# Altium PCB PCB1.PcbDoc
Units mil, origin at the board's own origin, x right, y up, seen from the top; angles counter-clockwise.
Board outline 4235 x 4000 mil, 2 copper layers (Top Layer, Bottom Layer); 49 components, 36 nets, 160 pads, 5 vias.
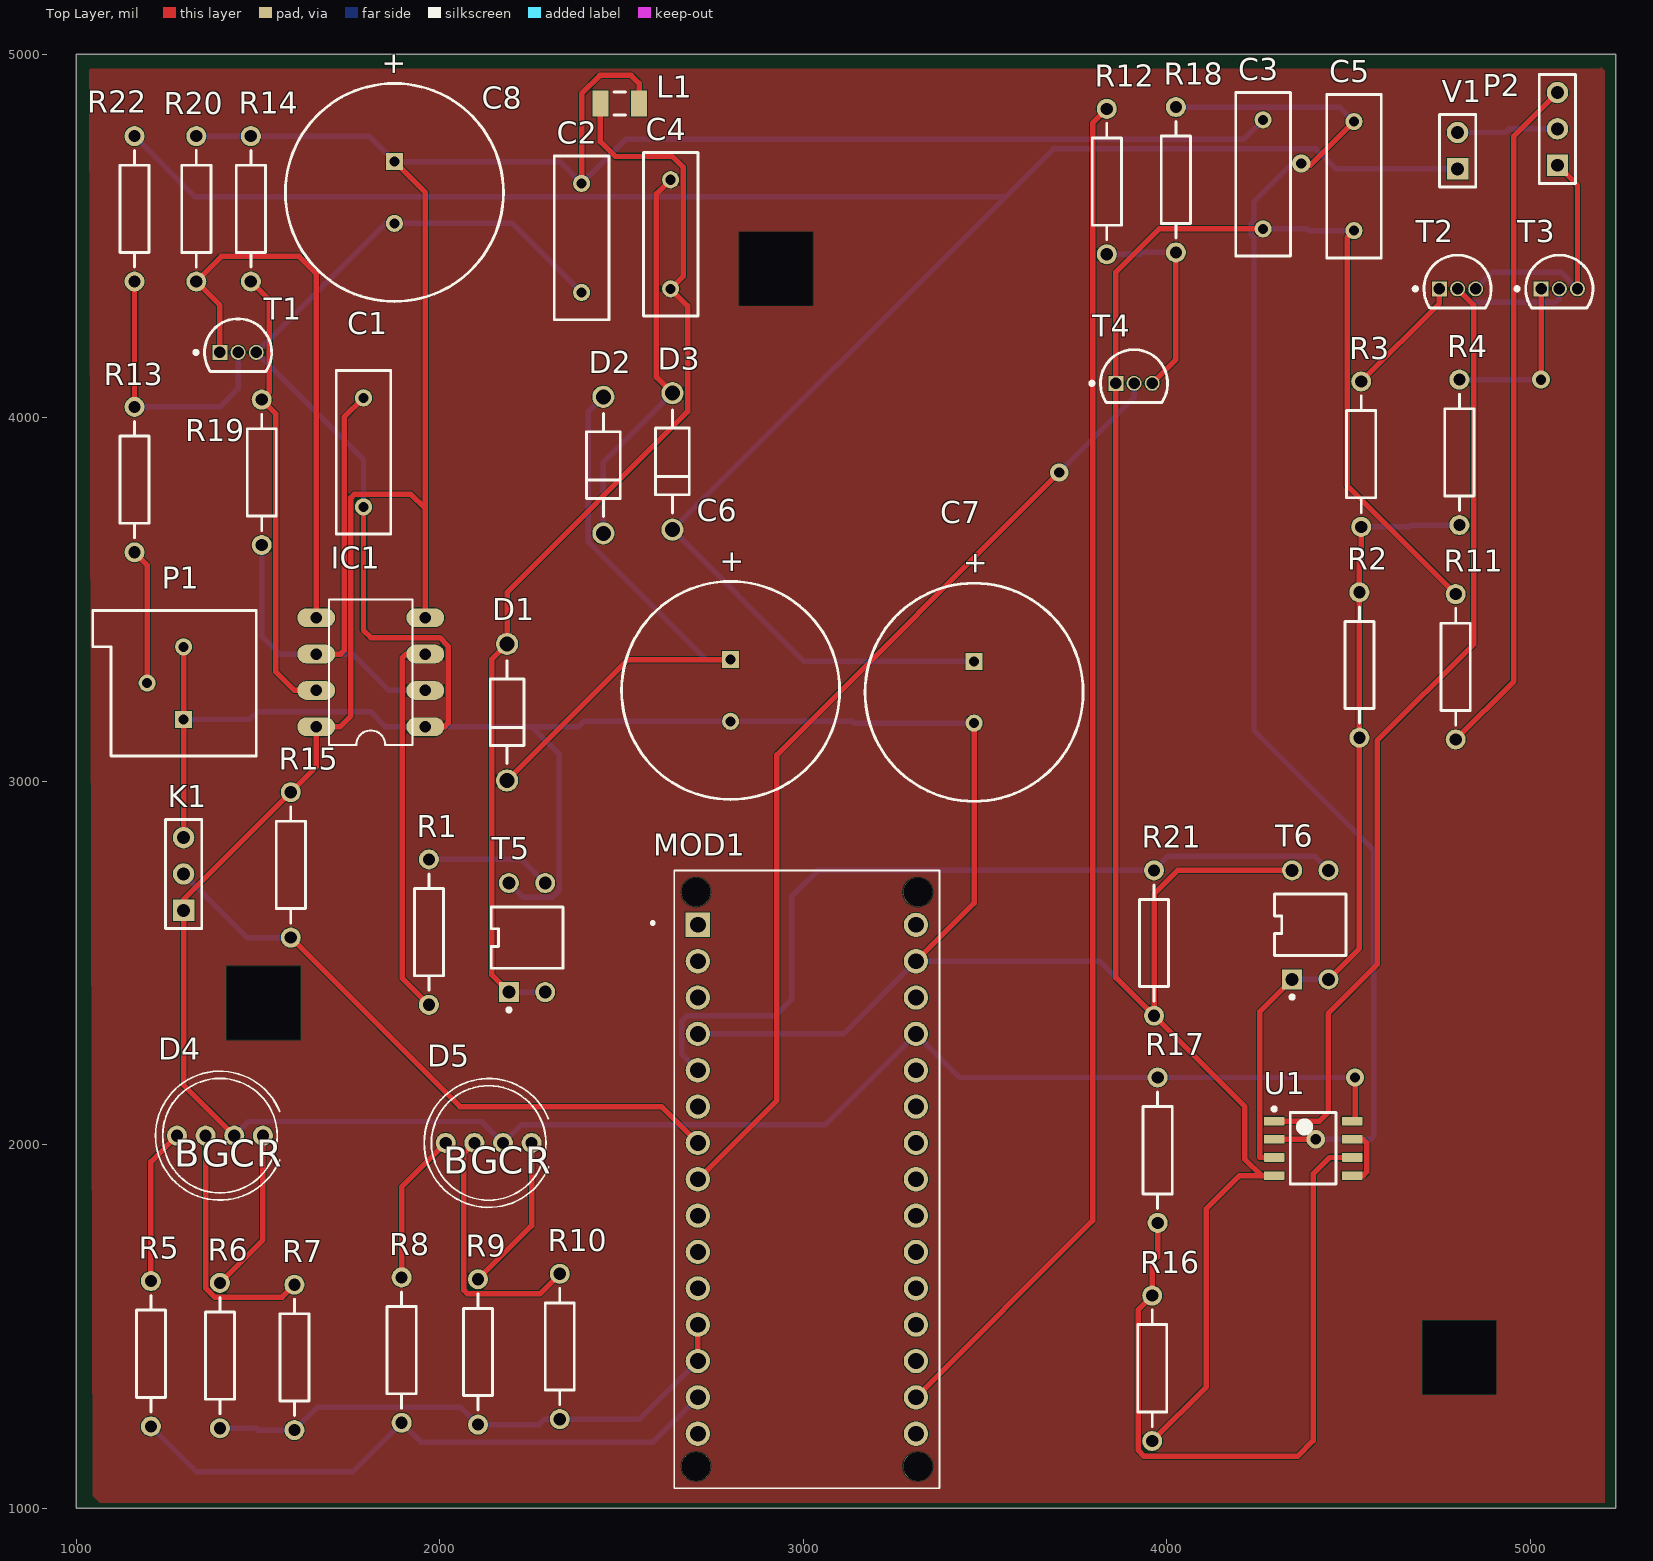
[diagram p0: Top Layer view]
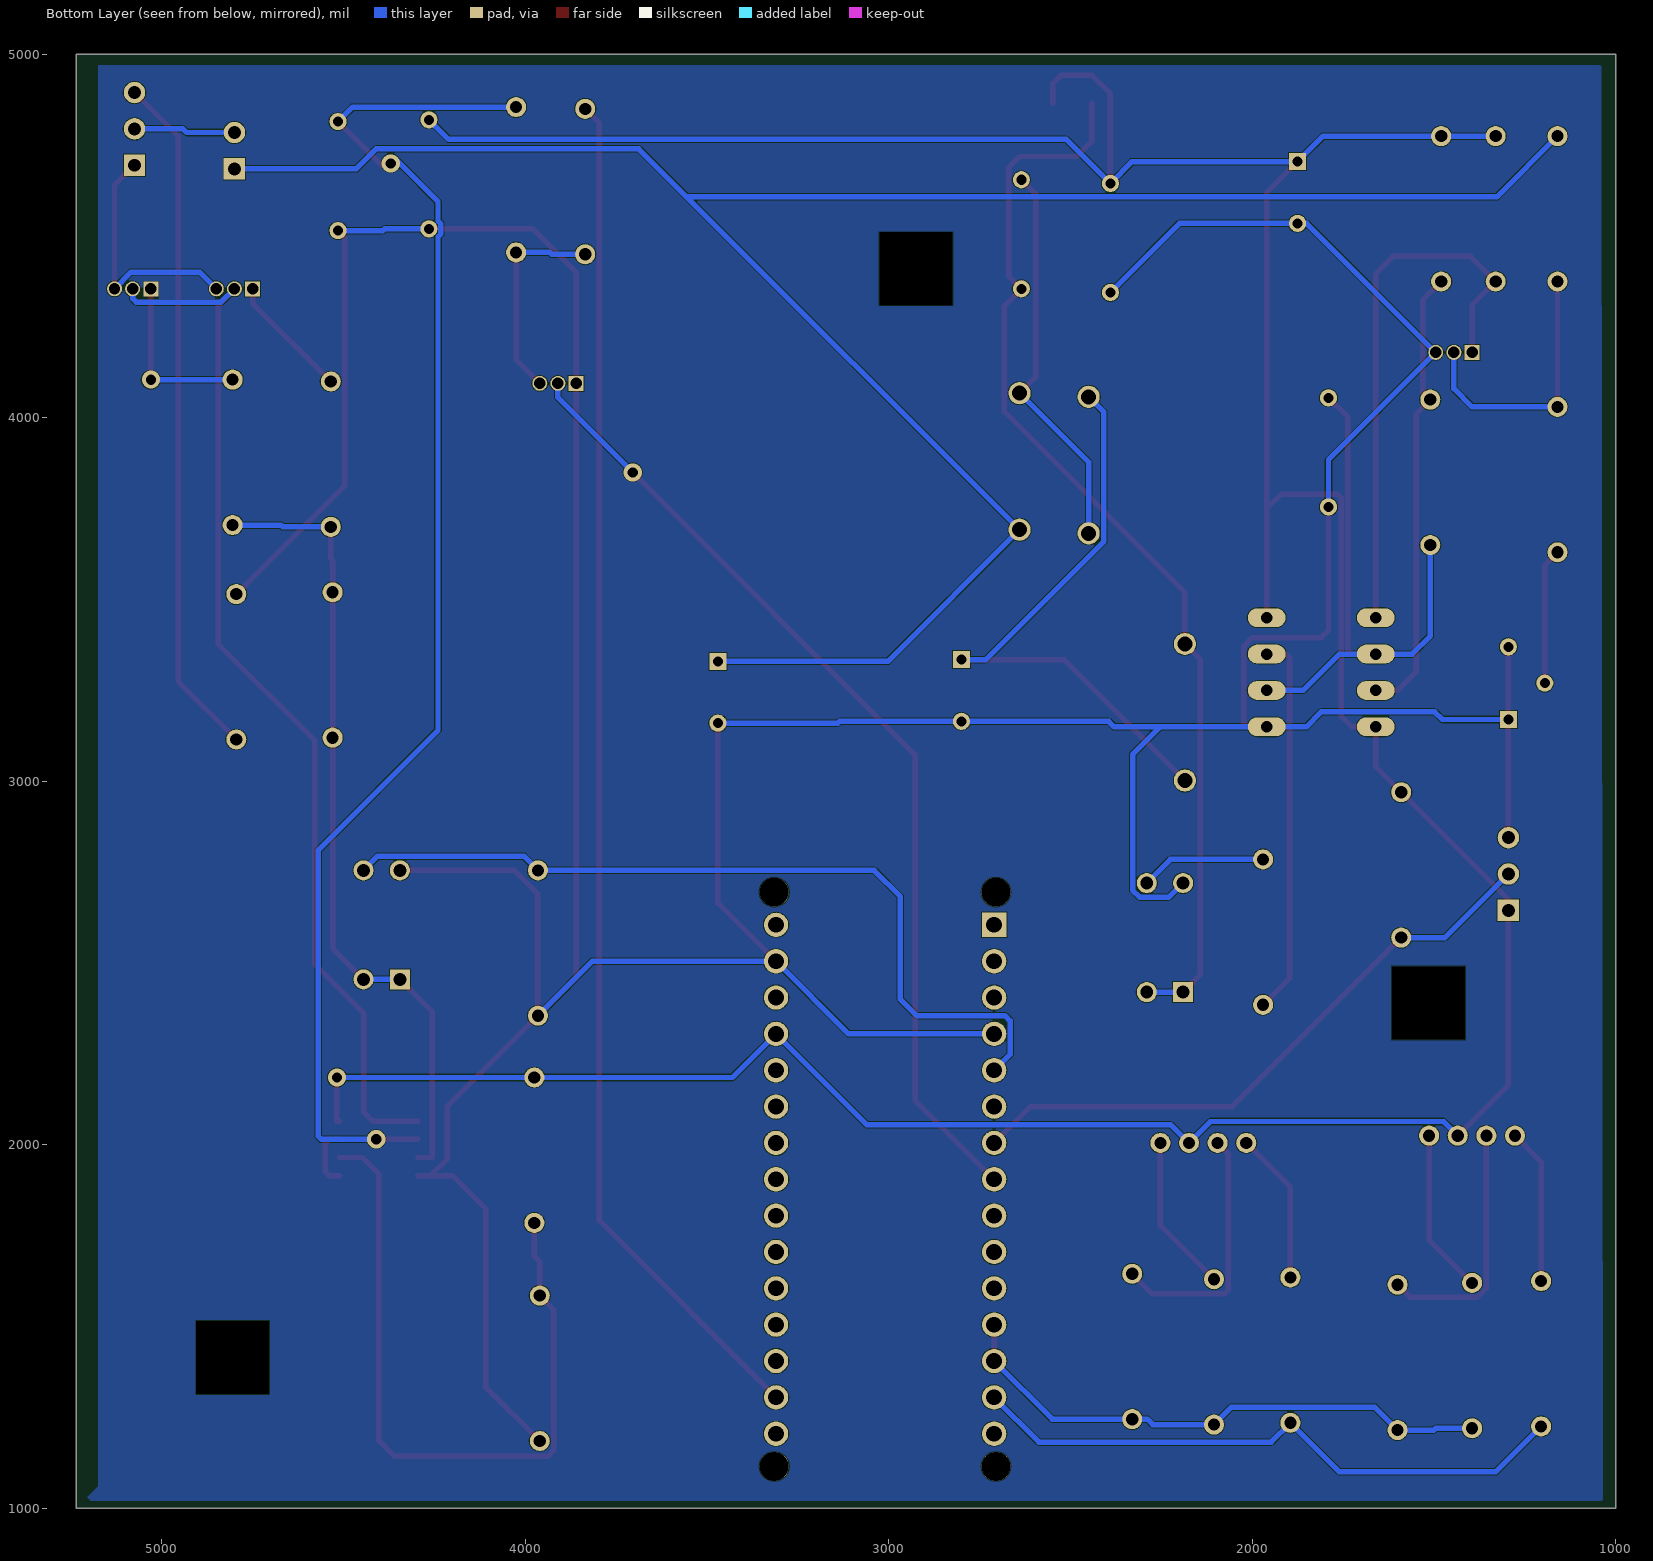
[diagram p1: Bottom Layer view, seen from below]

## Layer stack, top to bottom
Top Solder: solder mask 0.4, Solder Resist, Dk 3.5
Top Layer: signal copper 1.4
Dielectric 1: dielectric 12.6, FR-4, Dk 4.8
Bottom Layer: signal copper 1.4
Bottom Solder: solder mask 0.4, Solder Resist, Dk 3.5

## Board outline
1000,1000 5235,1000 5235,5000 1000,5000
cut-out: 6075,3825
cut-out: 5395,5455
cut-out: 6595,3025

## Design rules (kind name [scope] priority, off if disabled: settings)
Clearance [All] p1: gap=2 ignorepadtopadclearanceinfootprint=FALSE
DiffPairsRouting [All] p1: maxlimit=15 minlimit=15 mostfreqgap=15 toplayer_minwidth=15 toplayer_maxwidth=15 toplayer_prefwidth=15 bottomlayer_minwidth=15 bottomlayer_maxwidth=15 bottomlayer_prefwidth=15 maxuncoupledlength=500
HoleSize [All] p1: absolutevalues=TRUE maxlimit=200 minlimit=1 maxpercent=80.000 minpercent=20.000
MinimumSolderMaskSliver [All] p1: minsoldermaskwidth=0
PolygonConnect [All] p1: connectstyle=Relief reliefconductorwidth=10 reliefentries=4 polygonreliefangle="90 Angle" airgapwidth=10
RoutingVias [All] p1: holewidth=28 width=50 viastyle="Through Hole" minholewidth=28 minwidth=50 maxholewidth=28 maxwidth=50
SilkToSilkClearance [All] p1: silktosilkclearance=0
SilkToSolderMaskClearance [IsPad] p1: minsilkscreentomaskgap=0 clearancetoexposedcopper=TRUE
SolderMaskExpansion [All] p1: expansion=4 istentingtop=FALSE
Width [All] p1: maxlimit=15 minlimit=15 preferedwidth=15 minimp=50.000000 maximp=50.000000 favimp=50.000000
25 further rules are at their usual default settings.

## Components (designator, comment, footprint, x,y, rotation, side; value= is the part's Value field where it differs from the comment)
C1 "Cap" RAD-0.3 1790,3905 r90 top value=330p
C2 "Cap" RAD-0.3 2390,4495 r90 top value=100n
C3 "Cap" RAD-0.3 4265,4670 r90 top value=100n
C4 "Cap" RAD-0.3 2635,4505 r90 top value=100n
C5 "Cap" RAD-0.3 4515,4665 r90 top value=1u
C6 "200V" RB7.6-15 2800,3250 r90 top value=2u2
C7 "200V" RB7.6-15 3470,3245 r90 top value=2u2
C8 "Cap Pol1" RB7.6-15 1875,4620 r90 top value=220u
D1 "MUR160G" ONSC-AXIAL_LEAD-2-59-10_P 2185,3190 r90 top
D2 "MUR160G" ONSC-AXIAL_LEAD-2-59-10_P 2450,3870 r90 top
D3 "MUR160G" ONSC-AXIAL_LEAD-2-59-10_P 2640,3880 r90 top
D4 "DIP-LED-RGB-COMMON-ANODE(4P-D8MM)" *LED4-2.0-D8.0MM 1395,2025 r0 top
D5 "DIP-LED-RGB-COMMON-ANODE(4P-D8MM)" *LED4-2.0-D8.0MM 2134.37,2005 r0 top
IC1 "ICM7555" *DIL08 1810,3300 r90 top
K1 "Header 3" HDR1X3 1295,2645 r90 top
L1 "Inductor" INDC3216 2495,4865 r0 top value=47uH
MOD1 "ARDUINO_NANO" ARDUINO_A000005 3010,1905 r0 top
P1 "RPot" VR4 1245,3270 r90 top value=4.7K
P2 "Header 3" HDR1X3 5075,4695 r90 top
R1 "Res2" AXIAL-0.4 1970,2585 r90 top value=47
R2 "1%" AXIAL-0.4 4530,3320 r90 top value=150
R3 "Res2" AXIAL-0.4 4535,3900 r90 top value=220
R4 "Res2" AXIAL-0.4 4805,3905 r90 top value=220
R5 "Res2" AXIAL-0.4 1205,1425 r90 top value=330
R6 "Res2" AXIAL-0.4 1395,1420 r90 top value=330
R7 "Res2" AXIAL-0.4 1600,1415 r90 top value=330
R8 "Res2" AXIAL-0.4 1895,1435 r90 top value=330
R9 "Res2" AXIAL-0.4 2105,1430 r90 top value=330
R10 "Res2" AXIAL-0.4 2330,1445 r90 top value=330
R11 "1W" AXIAL-0.4 4795,3315 r90 top value=820
R12 "1%" AXIAL-0.4 3835,4650 r90 top value=1k
R13 "1%" AXIAL-0.4 1160,3830 r90 top value=2k2
R14 "Res2" AXIAL-0.4 1480,4575 r90 top value=3k3
R15 "Res2" AXIAL-0.4 1590,2770 r90 top value=4k7
R16 "Res2" AXIAL-0.4 3960,1385 r90 top value=10k
R17 "Res2" AXIAL-0.4 3975,1985 r90 top value=10k
R18 "1%" AXIAL-0.4 4025,4655 r90 top value=10k
R19 "Res2" AXIAL-0.4 1510,3850 r90 top value=27k
R20 "Res2" AXIAL-0.4 1330,4575 r90 top value=27k
R21 "Res2" AXIAL-0.4 3965,2555 r90 top value=100k
R22 "1%" AXIAL-0.4 1160,4575 r90 top value=820k
T1 "BC547B" ONSC-TO-92-3-29-11 1445,4180 r0 top
T2 "MPSA42" ONSC-TO-92-3-29-11 4800,4355 r0 top
T3 "MPSA42" ONSC-TO-92-3-29-11 5080,4355 r0 top
T4 "2N7000" ONSC-TO-92-3-29-11 3910,4095 r0 top
T5 "IRFD110PBF" Vishay_X10-0386_MFG 2240,2570 r90 top
T6 "IRFD110PBF" Vishay_X10-0386_MFG 4395,2605 r90 top
U1 "LM6142AIM" D0008A_N 4402.72,1990 r0 top
V1 "IN-9" HDR1X2 4800,4685 r90 top

## Footprints (in the part's own frame and the unit in brackets; to place one, negate y for a bottom-side part, rotate by r counter-clockwise, add the part's x,y. Pads: shape width x height; smd on the part's side, far side on the other; paste and mask are expansions set on the pad)
*DIL08 [mil]
  oval 52x104 hole 32: 1(-150,-150) 2(-50,-150) 3(50,-150) 4(150,-150) 5(150,150) 6(50,150) 7(-50,150) 8(-150,150)
  silkscreen extent -200,-115 200,115
*LED4-2.0-D8.0MM [mm]
  round 1.4 hole 0.85: 1(3,0) 2(1,0) 3(-1,0) 4(-3,0)
  silkscreen extent -4.5,-4.5 4.18,4.5
ARDUINO_A000005 [mm]
  rect 1.7x1.7 hole 1.1: 1(-7.62,17.78)
  round 1.7 hole 1.1: 2(-7.62,15.24) 3(-7.62,12.7) 4(-7.62,10.16) 5(-7.62,7.62) 6(-7.62,5.08) 7(-7.62,2.54) 8(-7.62,0) 9(-7.62,-2.54) 10(-7.62,-5.08) 11(-7.62,-7.62) 12(-7.62,-10.16) 13(-7.62,-12.7) 14(-7.62,-15.24) 15(-7.62,-17.78) 16(7.62,-17.78) 17(7.62,-15.24) 18(7.62,-12.7) 19(7.62,-10.16) 20(7.62,-7.62) 21(7.62,-5.08) 22(7.62,-2.54) 23(7.62,0) 24(7.62,2.54) 25(7.62,5.08) 26(7.62,7.62) 27(7.62,10.16) 28(7.62,12.7) 29(7.62,15.24) 30(7.62,17.78)
  round 2.028 hole 2.028 unplated: ""(-7.747,-20.066) ""(-7.747,20.066) ""(7.747,-20.066) ""(7.747,20.066)
  silkscreen extent -10.88,-21.59 9.27,21.59
AXIAL-0.4 [mm] "Axial Device, Thru-Hole; 2 Leads; 0.4 in Pin Spacing"
  round 1.4 hole 0.85: 1(-5.08,0) 2(5.08,0)
  silkscreen extent -4.06,-1.02 4.06,1.02
D0008A_N [mm] "SOIC, 8-Leads, Body 5x4mm, Pitch 1.27mm, IPC Medium Density"
  rrect17% 1.45x0.6 smd: 1(-2.725,1.905) 2(-2.725,0.635) 3(-2.725,-0.635) 4(-2.725,-1.905) 5(2.725,-1.905) 6(2.725,-0.635) 7(2.725,0.635) 8(2.725,1.905)
  silkscreen extent -2.85,-2.5 1.6,2.88, body extent -3,-2.45 3,2.45, height 1.63
HDR1X2 [mm] "Connector; Header; 2 Position"
  rect 1.5x1.5 hole 0.9: 1(0,0)
  round 1.5 hole 0.9: 2(2.54,0)
  silkscreen extent -1.27,-1.27 3.81,1.27
HDR1X3 [mm] "Connector; Header; 3 Position"
  rect 1.5x1.5 hole 0.9: 1(0,0)
  round 1.5 hole 0.9: 2(2.54,0) 3(5.08,0)
  silkscreen extent -1.27,-1.27 6.35,1.27
INDC3216 [mm] "Chip Inductor, Body 3.2x1.6mm, IPC High Density"
  rect 1.1x1.8 smd: 1(-1.35,0) 2(1.35,0)
  silkscreen extent -0.4,-0.8 0.4,0.8, body extent -1.7,-0.9 1.7,0.9, height 0.55
ONSC-AXIAL_LEAD-2-59-10_P [mm] "AXIAL, 2-Leads, Diameter 2.35mm"
  round 1.55 hole 1.05: 1(-4.77,0) 2(4.77,0)
  silkscreen extent -3.6,-1.18 3.6,1.18
ONSC-TO-92-3-29-11 [mm] "TO, 3-Leads, Body Dia 4.7mm, Pitch 1.27mm"
  rect 1.05x1.05 hole 0.8: 1(-1.27,0)
  round 1.05 hole 0.8: 2(0,0) 3(1.27,0)
  silkscreen extent -3.07,-1.34 2.35,2.35, body extent -2.35,-1.33 2.36,2.36, height 7.87
RAD-0.3 [mm] "Radial Cap, Thru-Hole; 2 Leads; 0.3 in Pin Spacing"
  round 1.2 hole 0.7: 1(-3.81,0) 2(3.81,0)
  silkscreen extent -5.71,-1.91 5.71,1.91
RB7.6-15 [mm] "Polarized Capacitor (Radial); 2 Leads"
  rect 1.2x1.2 hole 0.7: 1(2.159,0)
  round 1.2 hole 0.7: 2(-2.159,0)
  silkscreen extent -7.62,-7.62 7.62,7.62
Vishay_X10-0386_MFG [mm]
  rect 1.4x1.4 hole 0.9 paste-1000 mask+0: 1(-3.81,1.27)
  round 1.4 hole 0.9 paste-1000 mask+0: 2(3.81,1.27) 3(-3.81,-1.27) 4(3.81,-1.27)
  silkscreen extent -5.17,-2.5 2.14,2.5, body extent -4.61,-2.6 4.61,2.6, height 0.25
VR4 [mm] "Thru-Hole; 3 Leads"
  rect 1.2x1.2 hole 0.7: 1(-2.54,-1.27)
  round 1.2 hole 0.7: 2(0,1.27) 3(2.54,-1.27)
  silkscreen extent -5.08,-6.35 5.08,5.08

## Part data
C1 C2 C3 C4 C5: "Capacitor", LatestRevisionDate=17-Jul-2002, LatestRevisionNote="Re-released for DXP Platform.", PackageDescription="Radial Cap, Thru-Hole; 2 Leads; 0.3 in Pin Spacing", PackageReference=RAD-0.3, Published=8-Jun-2000, Publisher="Altium Limited"
C6 C7: library part "Cap Pol1", "Polarized Capacitor (Radial)", LatestRevisionDate=17-Jul-2002, LatestRevisionNote="Re-released for DXP Platform.", PackageDescription="Polarized Capacitor (Radial); 2 Leads", PackageReference=RB7.6-15, Published=8-Jun-2000, Publisher="Altium Limited"
C8: "Polarized Capacitor (Radial)", LatestRevisionDate=17-Jul-2002, LatestRevisionNote="Re-released for DXP Platform.", PackageDescription="Polarized Capacitor (Radial); 2 Leads", PackageReference=RB7.6-15, Published=8-Jun-2000, Publisher="Altium Limited"
D1 D2 D3: library part CMP-0902-00129-1, "SWITCHMODE(TM) Power Rectifier, 2-Pin Axial_Lead, Pb-Free, Bulk Bag", Manufacturer="On Semiconductor", ComponentLink1Description="Manufacturer URL", ComponentLink1URL=http://www.onsemi.com/, ComponentLink2Description=Datasheet, ComponentLink2URL=http://www.onsemi.com/pub_link/Collateral/MUR120-D.PDF, ComponentLink3Description="Package Specification", ComponentLink3URL=http://www.onsemi.cn/pub_link/Collateral/59-10.PDF, DatasheetVersion="Rev. 12", IFSM Max (A)=35, Mounting Technology="Through Hole", PackageDescription="2-Pin, Axial Lead, Diameter 2.35 mm", PackageReference=AXIAL_LEAD-2-59-10, PackageVersion="Rev. U, 02/2005", Packing="Bulk Bag", PartNumber=MUR160G, RoHS=TRUE, Type=Ultrafast, VRRM Max (V)=600
D4 D5: "DIP LED RGB Common Anode", Package=None, Availability=Unavailable, MF=Chengguangxing, MP=CZXR-80RGB03-A, Price=None, SnapEDA_Link=https://www.snapeda.com/parts/CZXR-80RGB03-A/Chengguangxing/view-part/106379/?ref=snap
K1 P2: "Header, 3-Pin", LatestRevisionDate=17-Jul-2002, LatestRevisionNote="Re-released for DXP Platform.", Publisher="Altium Limited"
MOD1: library part A000005, "ATmega328 Arduino Nano AVRÂ® ATmega AVR MCU 8-Bit Embedded Evaluation Board", Package=None, Digi-Key_Part_Number=1050-1001-ND, Digi-Key_Purchase_URL=https://www.digikey.com/product-detail/en/arduino/A000005/1050-1001-ND/2638989?utm_source=snapeda&utm_medium=aggregator&utm_campaign=symbol, MF=Arduino, MP=A000005, SnapEDA_Link=https://www.snapeda.com/parts/A000005/Arduino/view-part/77912/?ref=snap
P1: "Potentiometer", LatestRevisionDate=17-Jul-2002, LatestRevisionNote="Re-released for DXP Platform.", PackageDescription="Variable Resistor, Thru-Hole; 3 Leads", PackageReference=VR5, Published=8-Jun-2000, Publisher="Altium Limited", Set Position=0.5, Sim Note="Enter the Resistance value and the set point into parameter fields."
R1 R3 R4 R5 R6 R7 R8 R9 R10 R14 R15 R16 R17 R19 R20 R21: "Resistor", LatestRevisionDate=17-Jul-2002, LatestRevisionNote="Re-released for DXP Platform.", PackageDescription="Axial Device, Thru-Hole; 2 Leads; 0.4 in Pin Spacing", PackageReference=AXIAL-0.4, Published=8-Jun-2000, Publisher="Altium Limited"
R2 R11 R12 R13 R18 R22: library part Res2, "Resistor", LatestRevisionDate=17-Jul-2002, LatestRevisionNote="Re-released for DXP Platform.", PackageDescription="Axial Device, Thru-Hole; 2 Leads; 0.4 in Pin Spacing", PackageReference=AXIAL-0.4, Published=8-Jun-2000, Publisher="Altium Limited"
T1: library part CMP-1048-01467-1, "Amplifier Transistor, NPN Silicon, 3-Pin TO-92, Bulk Box", Manufacturer="On Semiconductor", ComponentLink1Description="Manufacturer URL", ComponentLink1URL=http://www.onsemi.com/, ComponentLink2Description=Datasheet, ComponentLink2URL=http://www.onsemi.com/pub_link/Collateral/BC546-D.PDF, ComponentLink3Description="Package Specification", ComponentLink3URL=http://www.onsemi.cn/pub_link/Collateral/2N6426-D.PDF, DatasheetVersion="Rev. 7", fT Min (MHz)=150, IC Continuous (A)=0.1, Mounting Technology="Through Hole", PackageDescription="3-Pin Transistor Outline, Body 4.825 x 3.685 mm, Pitch 1.27 mm", PackageReference=TO-92-3-29-11_AM_SL, PackageVersion="Rev. AM", Packing="Bulk Box", PartNumber=BC547B, Polarity=NPN, RoHS=FALSE
T2 T3: library part CMP-1048-01390-1, "High Voltage Transistor, NPN Silicon, 3-Pin TO-92, Bulk Box", Manufacturer="On Semiconductor", ComponentLink1Description="Manufacturer URL", ComponentLink1URL=http://www.onsemi.com/, ComponentLink2Description=Datasheet, ComponentLink2URL=http://www.onsemi.cn/pub_link/Collateral/MPSA42-D.PDF, ComponentLink3Description="Package Specification", ComponentLink3URL=http://www.onsemi.cn/pub_link/Collateral/2N6426-D.PDF, DatasheetVersion="Rev. 8", fT Min (MHz)=50, IC Continuous (A)=0.5, Mounting Technology="Through Hole", Note1=0, PackageDescription="3-Pin Transistor Outline, Body 4.825 x 3.685 mm, Pitch 1.27 mm", PackageReference=TO-92-3-29-11_AM_SL, PackageVersion="Rev. AM", Packing="Bulk Box", PartNumber=MPSA42, Polarity=NPN, RoHS=FALSE
T4: library part CMP-1058-00936-1, "Small Signal MOSFET, 200 mA, 60 V, N-Channel, 3-Pin TO-92, Bulk Box", Manufacturer="On Semiconductor", Package Type=TO-92, Channel Polarity="N Channel", Ciss Typ (pF)=60, ComponentLink1Description="Manufacturer URL", ComponentLink1URL=http://www.onsemi.com/, ComponentLink2Description=Datasheet, ComponentLink2URL=http://www.onsemi.com/pub_link/Collateral/2N7000-D.PDF, ComponentLink3Description="Package Specification", ComponentLink3URL=http://www.onsemi.cn/pub_link/Collateral/2N6426-D.PDF, Configuration=Single, Coss Typ (pF)=25, Crss Typ (pF)=5, DatasheetVersion="Rev. 8", ID Max (A)=0.2, Mounting Technology="Through Hole", PackageDescription="3-Pin Transistor Outline, Body 4.825 x 3.685 mm, Pitch 1.27 mm", PackageReference=TO-92-3-29-11_AM_SL, PackageVersion="Rev. AM", Packing="Bulk Box", PartNumber=2N7000, PD Max (W)=0.35, V(BR)DSS Min (V)=60, VGS Max (V)=20, VGS(th) Max (V)=3
U1: library part CMP-0055-00760-3, "Dual High Speed/Low Power 17 MHz Rail-to-Rail I/O Operational Amplifier, 8-pin Narrow SOIC", Manufacturer="Texas Instruments", Package Reference=D0008A, PackageTopMarking=NSZXTT*LM614*2AIM, PowerWise=N, Code_IPC=SOIC127P600-8, Code_JEDEC=MS-012-AA, ComponentLink1Description="Datasheet URL", ComponentLink1URL=http://www.ti.com/general/docs/lit/getliterature.tsp?genericPartNumber=LM6142&fileType=pdf, CompType=Amplifiers, PackageDescription="SOIC Narrow, 4.9 x 3.9 x 1.45mm, 8 Lead, 1.27mm Pitch", PinCount=8, RoHS=N
V1: library part "Header 2", "Header, 2-Pin", LatestRevisionDate=17-Jul-2002, LatestRevisionNote="Re-released for DXP Platform.", Publisher="Altium Limited"
IC1: SnapEDA_Link=https://www.snapeda.com/parts/ICM7555/Renesas%20Electronics%20America%20Inc./view-part/571575/?ref=snap
L1: Code_IEC=1005, Code_JEITA=0402, LatestRevisionDate=29-May-2009, LatestRevisionNote="IPC-7351 Footprint Added.", PackageDescription="Chip Inductor", PackageReference=0402-A, Published=8-Jun-2000, Publisher="Altium Limited"

## Free pads (board coordinates)
  round 60 hole 200 square: 6(1515,2390) 6(4805,1415) 8(2925,4410)

## Via types
v1: diameter 50, hole 28, Top Layer to Bottom Layer, 5 vias

## Nets (pads, with @x,y where several pads share a name; then routed paths per layer and width w, separated by ;. In a path a pad name is that pad's centre, name@x,y a point inside that pad or via, vN(x,y) a via of type N, cw(c..) or ccw(c..) an arc to the next point about the centre after c; other vN are vias at no path point)
1-WIRE: K1.2 MOD1.7 R15.1 | length 1721.5
  Top Layer w15: R15.1 2055,2105 2610,2105 MOD1.7
  Bottom Layer w15: K1.2 1470,2570 R15.1
75HZ: MOD1.5 R21.2 T6.4 | length 2302.8
  Bottom Layer w15: MOD1.5 2666,2249 2666,2341 2680,2355 2923,2355 2968,2400 2968,2683 3040,2755 R21.2 4004,2794 4406,2794 T6.4
+3V3: MOD1.17 R12.2 | length 3762.5
  Top Layer w15: MOD1.17 3796,1791 3796,4811 R12.2
+5V: C2.2 C3.2 C8.1 D4.2 D5.2 IC1.4 IC1.8 K1.1 L1.2 MOD1.27 R14.2 R15.2 R17.2 R20.2 U1.8 | length 10534.8
  Top Layer w15: D4.2 1295,2164.37 K1.1 1295,2675 R15.2 1660,3040 IC1.8 1725,3150 1755,3180 1755,3780 1765,3790 1920,3790 1960,3750 ; C8.1 1960,4620 1960,3750 ; IC1.4 1960,3750 ; C2.2 2390,4892 2440,4942 2526.15,4942 2548.15,4920 L1.2 ; U1.8 4518,2065 v1(4518,2185)
  Bottom Layer w15: R20.2 R14.2 1805,4775 C8.1 2330,4705 C2.2 2511,4766 4211,4766 C3.2 ; D4.2 1473.37,2064 2114.74,2064 D5.2 2223.74,2055 3060,2055 MOD1.27 3430,2185 R17.2 v1(4518,2185)
ANODE: C7.1 D3.1 R22.2 V1.1 | length 6061.8
  Bottom Layer w15: R22.2 1327,4608 3555.8,4608 ; C7.1 3002.2,3330 D3.1 3555.8,4608 ; V1.1 4465,4685 4410,4740 3687.8,4740 3555.8,4608
GND: C1.1 C2.1 C3.1 C5.1 C6.2 C7.2 C8.2 IC1.1 K1.3 MOD1.4 MOD1.29 P1.1 P1.3 R11.2 R16.1 R21.1 T1.3 T4.1 T5.2 T6.2 U1.4 | length 14194.1
  Top Layer w15: K1.3 P1.1 P1.3 ; C1.1 1790,3415 1810,3395 2000,3395 2023,3372 2023,3160 2013,3150 IC1.1 ; MOD1.29 3470,2665 C7.2 ; R16.1 4109,1334 4109,1824 4200,1915 4260,1915 ; C3.1 3979,4520 3860,4401 T4.1 3860,2460 R21.1 ; U1.4 4260,1915 ; T6.2 4030,2755 3965,2690 R21.1 ; C5.1 4496,4496 4496,3814 R11.2 ; R21.1 4215,2105 4215,1960 4260,1915
  Bottom Layer w15: P1.1 1477,3170 1498,3191 1810,3191 1851,3150 IC1.1 2253,3150 ; C1.1 1790,3885 T1.3 1850,4535 C8.2 2200,4535 C2.1 ; T5.2 2229,2681 2310,2681 2329,2700 2329,3074 2253,3150 ; MOD1.4 3110,2305 MOD1.29 3815,2505 R21.1 ; C7.2 3140,3160 3135,3165 C6.2 2395,3165 2380,3150 2253,3150 ; C3.1 4387,4520 4392,4515 C5.1
KATHODE: P2.2 V1.2 | length 279.1
  Bottom Layer w15: V1.2 4932,4785 4942,4795 P2.2
NetC1_2: C1.2 IC1.2 IC1.6 R19.1 | length 1560.2
  Top Layer w15: IC1.6 1727,3350 1737,3360 1737,4002 C1.2
  Bottom Layer w15: R19.1 1510,3400 1560,3350 IC1.6 1760,3350 1860,3250 IC1.2
NetC4_1: C4.1 D1.2 L1.1 T5.1 T5.3 | length 3008.3
  Top Layer w15: T5.1 2143,2467 2143,3335.8 D1.2 2185,3520 2682,4017 2682,4308 C4.1 2670,4390 2670,4689 2640,4719 2482.85,4719 2441.85,4760 L1.1
  Bottom Layer w15: T5.1 T5.3
NetC4_2: C4.2 D2.1 D3.2 | length 1085.9
  Top Layer w15: C4.2 2596,4616 2596,4111.8 D3.2
  Bottom Layer w15: D2.1 2450,3877.8 D3.2
NetC5_2: C5.2 R18.2 U1.2 | length 3875
  Top Layer w15: U1.2 v1(4410,2015) ; v1(4370.13,4700.13) 4375.25,4695 4395,4695 C5.2
  Bottom Layer w15: R18.2 4475,4855 C5.2 ; v1(4370.13,4700.13) 4363.84,4706.41 4351.41,4706.41 4240,4595 4240,4541.84 4231.88,4533.72 4231.88,4506.28 4240,4498.16 4240,3140 4570,2810 4570,2023.79 4561.21,2015 v1(4410,2015)
NetC6_1: C6.1 D1.1 D2.2 | length 1694.7
  Top Layer w15: D1.1 2517.8,3335 C6.1
  Bottom Layer w15: D2.2 2408,4015.8 2408,3660 2733,3335 C6.1
NetD4_1: D4.1 R6.2 | length 453.9
  Top Layer w15: R6.2 1513.11,1738.11 D4.1
NetD4_3: D4.3 R7.2 | length 688.2
  Top Layer w15: D4.3 1355.63,1605.37 1380,1581 1566,1581 R7.2
NetD4_4: D4.4 R5.2 | length 429.8
  Top Layer w15: R5.2 1205,1953.11 D4.4
NetD5_1: D5.1 R9.2 | length 436.1
  Top Layer w15: R9.2 2252.48,1777.48 D5.1
NetD5_3: D5.3 R10.2 | length 707.9
  Top Layer w15: D5.3 2066,1976 2066,1600 2076,1590 2275,1590 R10.2
NetD5_4: D5.4 R8.2 | length 420.2
  Top Layer w15: R8.2 1895,1883.74 D5.4
NetIC1_3: IC1.3 R1.1 | length 1052.4
  Top Layer w15: IC1.3 1907,3350 1897,3340 1897,2458 R1.1
NetIC1_5: IC1.5 R20.1 T1.1 | length 1547
  Top Layer w15: T1.1 1395,4310 R20.1 1399,4444 1613,4444 1660,4397 IC1.5
NetIC1_7: IC1.7 R14.1 R19.2 | length 1252.1
  Top Layer w15: R14.1 1531,4324 1531,4071 R19.2 1549,4011 1549,3301 1600,3250 IC1.7
NetP1_2: P1.2 R13.1 | length 374.5
  Top Layer w15: R13.1 1195,3595 P1.2
NetP2_1: P2.1 T2.3 T3.3 | length 680.9
  Top Layer w15: P2.1 5130,4640 T3.3
  Bottom Layer w15: T2.3 4896,4401 5084,4401 T3.3
NetP2_3: P2.3 R11.1 | length 1896
  Top Layer w15: R11.1 4955,3275 4955,4775 P2.3
NetR1_2: R1.2 T5.4 | length 346.9
  Bottom Layer w15: R1.2 2225,2785 T5.4
NetR2_1: R2.1 R2.2 R3.1 R4.1 T6.1 T6.3 U1.3 | length 2220.6
  Top Layer w15: U1.3 4256,1965 4256,2366 T6.1 ; T6.3 4530,2540 R2.1 R2.2 4530,3607 4535,3612 R3.1
  Bottom Layer w15: T6.1 T6.3 ; R3.1 4667,3700 4672,3705 R4.1
NetR3_2: R3.2 T2.1 | length 344.1
  Top Layer w15: R3.2 4750,4315 T2.1
NetR4_2: R4.2 T3.1 | length 475
  Top Layer w15: v1(5030,4105) T3.1
  Bottom Layer w15: R4.2 v1(5030,4105)
NetR12_1: R12.1 R18.1 T4.3 | length 579
  Top Layer w15: T4.3 4025,4160 R18.1
  Bottom Layer w15: R12.1 3927,4450 3932,4455 R18.1
NetR13_2: R13.2 R22.1 T1.2 | length 750.7
  Top Layer w15: R13.2 R22.1
  Bottom Layer w15: R13.2 1395,4030 1445,4080 T1.2
NetR16_2: R16.2 R17.1 U1.6 | length 2013.9
  Top Layer w15: R17.1 3975,1692 3960,1677 R16.2 3921,1546 3921,1160 3938,1143 4360,1143 4403,1186 4403,1920 4448,1965 U1.6
NetT2_2: T2.2 T3.2 U1.1 | length 2934.9
  Top Layer w15: U1.1 4420,2065 4444,2089 4444,2361 4579,2496 4579,3112 4844,3377 4844,4311 T2.2
  Bottom Layer w15: T2.2 4837,4318 5070,4318 5080,4328 T3.2
NetU1_5: U1.5 U1.7 | length 168.3
  Top Layer w15: U1.5 4540,1915 4550,1925 4550,2005 4540,2015 U1.7
PWM_B: MOD1.14 R5.1 R8.1 | length 1685.6
  Bottom Layer w15: R5.1 1330,1100 1760,1100 R8.1 1948,1182 2587,1182 MOD1.14
PWM_G: MOD1.12 MOD1.13 R6.1 R7.1 R9.1 R10.1 | length 1535.5
  Top Layer w15: MOD1.13 MOD1.12
  Bottom Layer w15: R6.1 1495,1220 1500,1215 R7.1 1663,1278 2057,1278 R9.1 2273,1230 2288,1245 R10.1 2550,1245 MOD1.13
TUBE_PWM: MOD1.8 T4.2 | length 2687.1
  Top Layer w15: MOD1.8 2927,2122 2927,3073 v1(3704,3850)
  Bottom Layer w15: v1(3704,3850) 3910,4056 T4.2
pads on no net: MOD1. MOD1.1 MOD1.2 MOD1.3 MOD1.6 MOD1.9 MOD1.10 MOD1.11 MOD1.15 MOD1.16 MOD1.18 MOD1.19 MOD1.20 MOD1.21 MOD1.22 MOD1.23 MOD1.24 MOD1.25 MOD1.26 MOD1.28 MOD1.30

## Polygon pours and split planes (outlines as drawn)
no net on Top Layer "NONET_L01_P007" (solid, pour order 7): 1035,4960 5190,4960 5195,4965 5205,4955 5205,1015 1065,1015 1045,1035
no net on Top Layer "NONET_L01_P002" (solid, pour order 2): 110,1680
no net on Top Layer "NONET_L01_P001" (solid, pour order 1): 305,1570
no net on Bottom Layer "NONET_L02_P006" (solid, pour order 6): 1040,4975 1045,4970 5175,4970 5175,1060 5205,1030 5195,1020 1035,1020

## Silkscreen, mask and mechanical layers (free items; w line width, h text height)
boardoutline:
  lines w10: 5220,5025 5250,4995 ; 1005,1040 1005,4985 5225,4985 5215,4975 5215,1015 5212.5,1012.5 1032.5,1012.5 1005,1040

## Text inside footprints (layer, text, board x,y; h text height)
C6: Top Overlay "+" at 2829.01,3570.15 h59.06 r90
C7: Top Overlay "+" at 3499.01,3565.15 h59.06 r90
C8: Top Overlay "+" at 1900,4940 h59.06 r90
D4: Top Overlay "R" at 1495.12,1940.07 h73.82; Top Overlay "C" at 1420.02,1940.1 h73.82; Top Overlay "G" at 1344.94,1940.07 h73.82; Top Overlay "B" at 1269.85,1940.07 h73.82
D5: Top Overlay "R" at 2234.49,1920.07 h73.82; Top Overlay "C" at 2159.39,1920.1 h73.82; Top Overlay "G" at 2084.31,1920.07 h73.82; Top Overlay "B" at 2009.22,1920.07 h73.82